# Altium PCB WX0.012.588PCB-4.2.PcbDoc
Units mil, origin at the board's own origin, x right, y up, seen from the top; angles counter-clockwise.
Board outline 5116.8 x 4810.03 mil, 2 copper layers (Top Layer, Bottom Layer); 13 components, 11 nets, 35 pads, 182 vias.
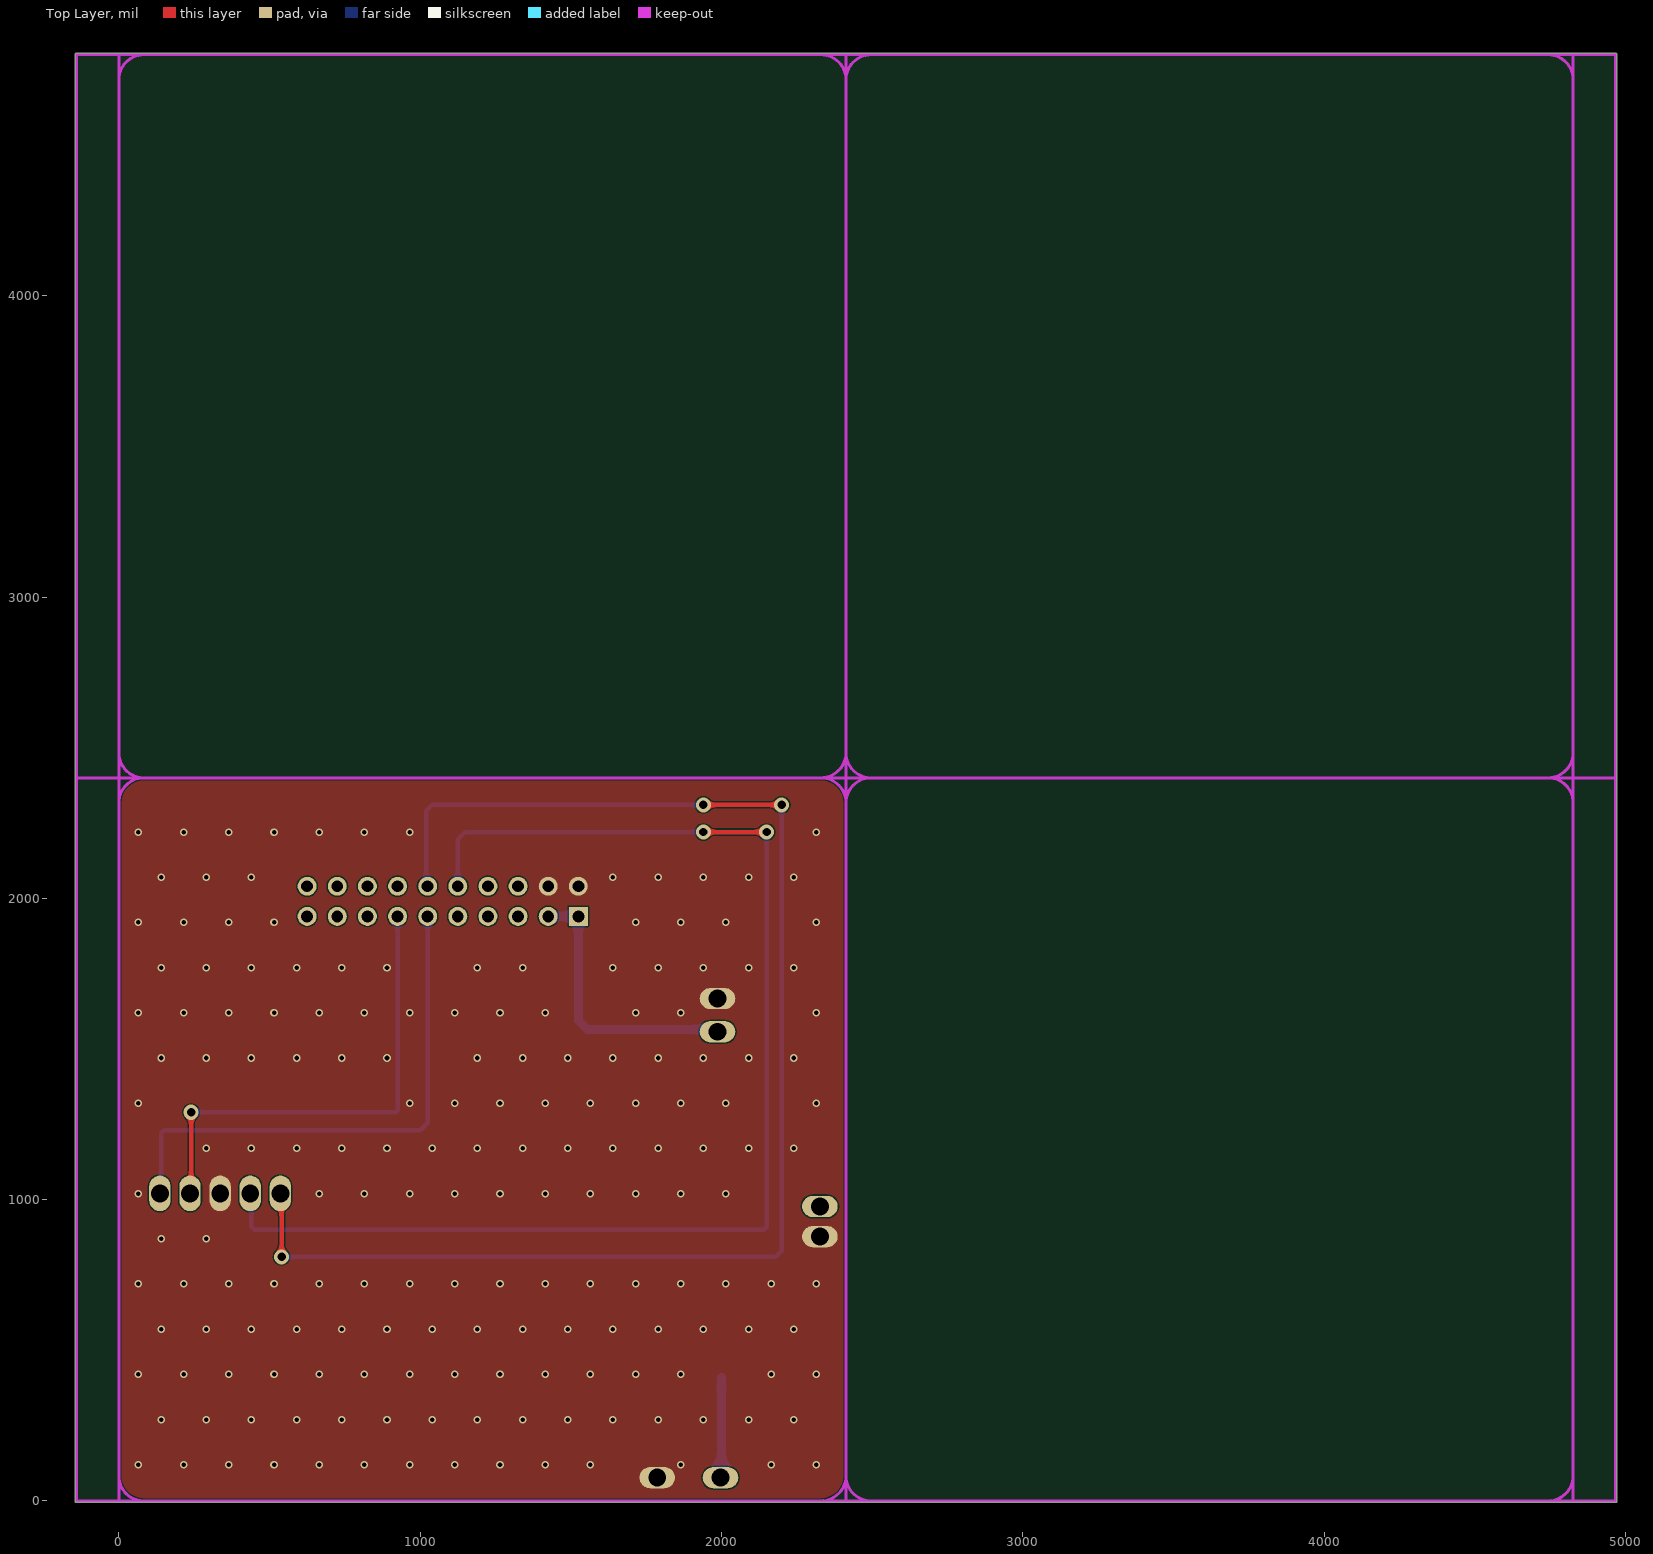
[diagram p0: Top Layer view]
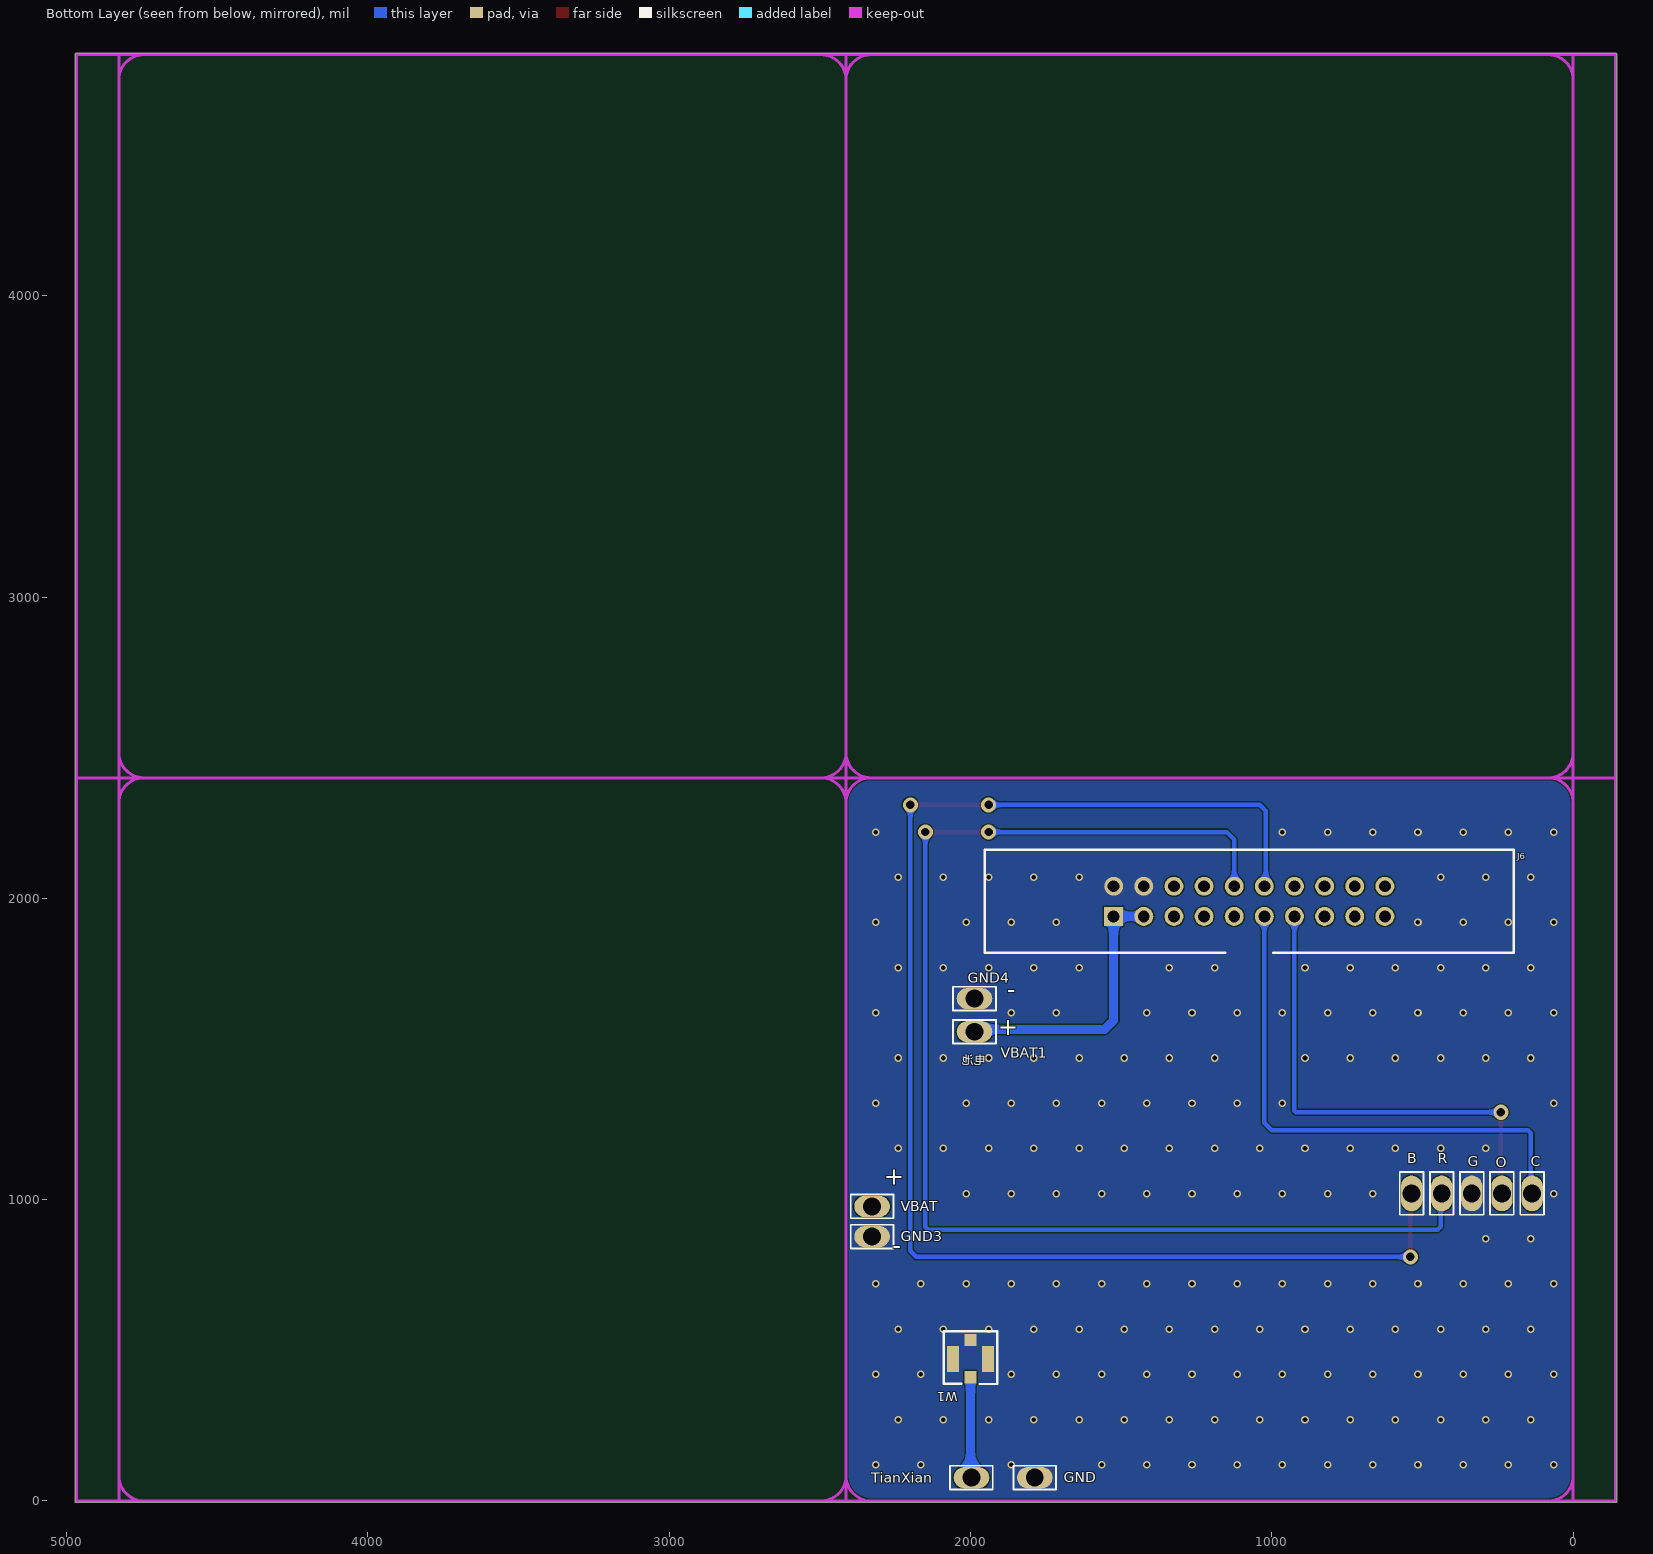
[diagram p1: Bottom Layer view, seen from below]

## Layer stack, top to bottom
Top Solder: solder mask 0.4, Solder Resist, Dk 3.5
Top Layer: signal copper 1.4
Dielectric 1: dielectric 12.6, FR-4, Dk 4.8
Bottom Layer: signal copper 1.4
Bottom Solder: solder mask 0.4, Solder Resist, Dk 3.5

## Board outline
-140,-5.02 70,-5.02 ccw(c70,0) 72.38,-4.42 ccw(c83.13,83.33) 79.81,-5.01 ccw(c80,0) 80,-5.02 2330,-5.02 ccw(c2330,0) 2330.03,-5.01 ccw(c2330,83.39) 2338.1,-4.64 ccw(c2340,0) 2340,-5.02 2483.39,-5.02 ccw(c2483.39,0) 2485.76,-4.42 ccw(c2496.52,83.33) 2493.2,-5.01 ccw(c2493.39,0) 2493.39,-5.02 4743.39,-5.02 ccw(c4743.39,0) 4743.42,-5.01 ccw(c4743.39,83.39) 4751.49,-4.64 ccw(c4753.39,0) 4753.39,-5.02 4966.77,-5.02 ccw(c4966.77,0) 4971.79,0 4971.79,4800 ccw(c4966.77,4800) 4966.77,4805.02 -140,4805.02 ccw(c-140,4800) -145.02,4800 -145.02,0 ccw(c-140,0)

## Design rules (kind name [scope] priority, off if disabled: settings)
Clearance [All] p1: gap=4 ignorepadtopadclearanceinfootprint=FALSE
MinimumSolderMaskSliver [All] p1: minsoldermaskwidth=0
PlaneConnect [All] p1: planeconnectstyle=Direct reliefexpansion=20 reliefentries=4 reliefconductorwidth=10 reliefairgap=10
PolygonConnect [All] p1: connectstyle=Direct reliefconductorwidth=10 reliefentries=4 polygonreliefangle="90 Angle" airgapwidth=10
RoutingVias [All] p1: holewidth=28 width=50 viastyle="Through Hole" minholewidth=28 minwidth=50 maxholewidth=28 maxwidth=50
SilkToSilkClearance [All] p1: silktosilkclearance=0
SilkToSolderMaskClearance [IsPad] p1: minsilkscreentomaskgap=0 clearancetoexposedcopper=TRUE
SolderMaskExpansion [All] p1: expansion=4
Width [All] p1: maxlimit=150 minlimit=15 preferedwidth=15
26 further rules are at their usual default settings.

## Components (designator, comment, footprint, x,y, rotation, side; value= is the part's Value field where it differs from the comment)
B "Test Point" TP5 136.26,1020.63 r0 bottom (schematic designator TP1)
C "Test Point" TP5 536.26,1020.63 r0 bottom (schematic designator TP1)
G "Test Point" TP5 336.26,1020.63 r0 bottom (schematic designator TP1)
GND "Test Point" TP5 1786.91,77.22 r270 bottom (schematic designator TP1)
GND3 "Test Point" TP5 2326.91,877.22 r270 bottom (schematic designator TP1)
GND4 "Test Point" TP5 1986.91,1667.22 r270 bottom (schematic designator TP1)
J6 "DC254_2*10" DC254_2*10 1075,1990 r90 bottom (schematic designator J1)
O "Test Point" TP5 436.26,1020.63 r0 bottom (schematic designator TP1)
R "Test Point" TP5 236.26,1020.63 r0 bottom (schematic designator TP1)
TianXian "Test Point" TP5 1996.91,77.22 r270 bottom (schematic designator TP1)
VBAT "Test Point" TP5 2326.91,977.22 r270 bottom (schematic designator TP1)
VBAT1 "Test Point" TP5 1986.91,1557.22 r270 bottom (schematic designator TP1)
W1 "天线" ANT-IPEX 2000,410 r180 bottom

## Footprints (in the part's own frame and the unit in brackets; to place one, negate y for a bottom-side part, rotate by r counter-clockwise, add the part's x,y. Pads: shape width x height; smd on the part's side, far side on the other; paste and mask are expansions set on the pad)
ANT-IPEX [mm] "IPX天线座"
  rect 1x1.05 smd: 1(0,0)
  rect 1x2.2 smd: 2(-1.475,1.55) 2(1.475,1.55)
  rect 1x1 smd: 2(0,3.151)
  silkscreen extent -2.26,-0.56 2.26,3.9
DC254_2*10 [mm]
  rect 1.6x1.6 hole 1: 1(-1.27,11.43)
  round 1.6 hole 1: 2(1.27,11.43) 3(-1.27,8.89) 4(1.27,8.89) 5(-1.27,6.35) 6(1.27,6.35) 7(-1.27,3.81) 8(1.27,3.81) 9(-1.27,1.27) 10(1.27,1.27) 11(-1.27,-1.27) 12(1.27,-1.27) 13(-1.27,-3.81) 14(1.27,-3.81) 15(-1.27,-6.35) 16(1.27,-6.35) 17(-1.27,-8.89) 18(1.27,-8.89) 19(-1.27,-11.43) 20(1.27,-11.43)
  silkscreen extent -4.35,-22.3 4.35,22.3
TP5 [mm]
  oval 1.8x3 hole 1.5: 1(0,0)
  silkscreen extent -1,-1.8 1,1.8

## Part data
B C G GND GND3 GND4 O R TianXian VBAT VBAT1: library part "Test Point  PASS", "测试点"
J6: library part 1010902-0139, "DC2 2.54mm 2x10pin,2.54mm间距，2x10pin，32×8.55×27.5mm,母头,双排,双排牛角座", Part Name=DC牛角座, ID=4, Part Number=1010902-0139, SMD/DIP=DIP
W1: library part 1010902-0145, "UB06000058A,3*3.1*1.25mm,公头,单排,IPEX一代板端"

## Via types
v1: diameter 25, hole 15, Top Layer to Bottom Layer, tented both sides, 176 vias
v2: diameter 50, hole 28, Top Layer to Bottom Layer, tented both sides, 6 vias

## Nets (pads, with @x,y where several pads share a name; then routed paths per layer and width w, separated by ;. In a path a pad name is that pad's centre, name@x,y a point inside that pad or via, vN(x,y) a via of type N, cw(c..) or ccw(c..) an arc to the next point about the centre after c; other vN are vias at no path point)
3.6V: J6.1 J6.3 VBAT1.1 | length 921.4
  Bottom Layer w30: J6.3 J6.1 1525,1595 1555,1565 VBAT1.1@1989,1565
CLOSE: B.1 J6.11 | length 1785.4
  Bottom Layer w15: B.1 140,1024.37 140,1220 150,1230 1000,1230 1025,1255 J6.11
DRV+: C.1 J6.12 | length 4797.9
  Top Layer w15: C.1 540,1016.89 v2(540,810) ; v2(1940,2310) v2(2200,2310)
  Bottom Layer w15: v2(540,810) 2180,810 2200,830 v2(2200,2310) ; J6.12@1030,2045 1020,2055 1020,2290 1040,2310 v2(1940,2310)
DRV-: J6.10 O.1 | length 4330.8
  Top Layer w15: v2(1940,2220) v2(2150,2220)
  Bottom Layer w15: O.1 440,1016.89 440,910 450,900 2140,900 2150,910 v2(2150,2220) ; J6.10 1125,2195 1150,2220 v2(1940,2220)
GND: G.1 GND3.1 GND4.1 GND.1 J6.2 J6.4 W1.2
  other v1: 65,120 215,120 365,120 515,120 665,120 815,120 965,120 1115,120 1265,120 1415,120 1565,120 1865,120 2165,120 2315,120 140,270 290,270 440,270 590,270 740,270 890,270 1040,270 1190,270 1340,270 1490,270 1640,270 1790,270 1940,270 2090,270 2240,270 65,420 215,420 365,420 515,420 665,420 815,420 965,420 1115,420 1265,420 1415,420 1565,420 1715,420 1865,420 2165,420 2315,420 140,570 290,570 440,570 590,570 740,570 890,570 1040,570 1190,570 1340,570 1490,570 1640,570 1790,570 1940,570 2090,570 2240,570 65,720 215,720 365,720 515,720 665,720 815,720 965,720 1115,720 1265,720 1415,720 1565,720 1715,720 1865,720 2015,720 2165,720 2315,720 140,870 290,870 65,1020 665,1020 815,1020 965,1020 1115,1020 1265,1020 1415,1020 1565,1020 1715,1020 1865,1020 2015,1020 290,1170 440,1170 590,1170 740,1170 890,1170 1040,1170 1190,1170 1340,1170 1490,1170 1640,1170 1790,1170 1940,1170 2090,1170 2240,1170 65,1320 965,1320 1115,1320 1265,1320 1415,1320 1565,1320 1715,1320 1865,1320 2015,1320 2315,1320 140,1470 290,1470 440,1470 590,1470 740,1470 890,1470 1190,1470 1340,1470 1490,1470 1640,1470 1790,1470 1940,1470 2090,1470 2240,1470 65,1620 215,1620 365,1620 515,1620 665,1620 815,1620 965,1620 1115,1620 1265,1620 1415,1620 1715,1620 1865,1620 2315,1620 140,1770 290,1770 440,1770 590,1770 740,1770 890,1770 1190,1770 1340,1770 1640,1770 1790,1770 1940,1770 2090,1770 2240,1770 65,1920 215,1920 365,1920 515,1920 1715,1920 1865,1920 2015,1920 2315,1920 140,2070 290,2070 440,2070 1640,2070 1790,2070 1940,2070 2090,2070 2240,2070 65,2220 215,2220 365,2220 515,2220 665,2220 815,2220 965,2220 2315,2220
OPEN: J6.13 R.1 | length 1603
  Top Layer w15: R.1 240,1024.37 v2(240,1290)
  Bottom Layer w15: v2(240,1290) 920,1290 925,1295 J6.13
tianxian: TianXian.1 W1.1 | length 330
  Bottom Layer w30: TianXian.1@2000,80 W1.1
VCC: J6.7
WF7502_D: J6.18
WF7502_P: J6.16
WF7502_T: J6.14 | length 7.1
  Top Layer w15: J6.14 J6.14@930,2045
pads on no net: J6.5 J6.6 J6.8 J6.9 J6.15 J6.17 J6.19 J6.20 VBAT.1

## Polygon pours and split planes (outlines as drawn)
GND on Top Layer "Top Layer-No Net" (solid, remove dead copper, pour order 32): -140,-5.02 70,-5.02 ccw(c70,0) 72.38,-4.42 ccw(c83.13,83.33) 79.81,-5.01 ccw(c80,0) 80,-5.02 2330,-5.02 ccw(c2330,0) 2330.03,-5.01 cw(c2330.02,83.36) 2330,-5.01 2330.03,-5.01 ccw(c2330,83.39) 2338.1,-4.64 ccw(c2340,0) 2340,-5.02 2413.39,-5.02 ccw(c2413.39,0) 2418.4,0 2418.4,2400 ccw(c2413.39,2400) 2413.39,2405.01 -140,2405.01 ccw(c-140,2400) -145.02,2400 -145.02,0 ccw(c-140,0)
GND on Bottom Layer "Top Layer-No Net1" (solid, remove dead copper, pour order 33): -140,-5.02 70,-5.02 ccw(c70,0) 72.38,-4.42 ccw(c83.13,83.33) 79.81,-5.01 ccw(c80,0) 80,-5.02 2330,-5.02 ccw(c2330,0) 2330.03,-5.01 cw(c2330.02,83.36) 2330,-5.01 2330.03,-5.01 ccw(c2330,83.39) 2338.1,-4.64 ccw(c2340,0) 2340,-5.02 2413.39,-5.02 ccw(c2413.39,0) 2418.4,0 2418.4,2400 ccw(c2413.39,2400) 2413.39,2405.01 -140,2405.01 ccw(c-140,2400) -145.02,2400 -145.02,0 ccw(c-140,0)

## Keep-outs
Keep-Out Layer:
  lines w10: -0.25,83.33 ccw(c83.13,83.33) 80,0 2330,0 ccw(c2330,83.39) 2413.39,83.39 ; -0.25,2483.33 ccw(c83.13,2483.33) 80,2400 ; 0,2320 0,80 0,0 ; 0,4720 0,2480 0,2400 ; 70,0 0,0 ; 70,2400 0,2400 ; 83.39,2400 ccw(c83.39,2316.61) 0,2316.61 0,2400 ; 83.39,4800 ccw(c83.39,4716.61) 0,4716.61 0,4800 ; 2340,0 2413.39,0 ; 2340,2400 2413.39,2400 ; 2413.13,83.33 ccw(c2496.52,83.33) 2493.39,0 4743.39,0 ccw(c4743.39,83.39) 4826.77,83.39 ; 2413.13,2483.33 ccw(c2496.52,2483.33) 2493.39,2400 ; 2413.39,2193.46 2413.39,2400 ; 2413.39,2320 2413.39,80 2413.39,0 ; 2413.39,2330 2413.39,83.39 ; 2413.39,4593.46 2413.39,4800 ; 2413.39,4720 2413.39,2480 2413.39,2400 ; 2413.39,4730 2413.39,2483.39 ; 2483.39,0 2413.39,0 ; 2483.39,2400 2413.39,2400 ; 2496.77,2400 ccw(c2496.77,2316.61) 2413.39,2316.61 ; 2496.77,4800 ccw(c2496.77,4716.61) 2413.39,4716.61 ; 4753.39,0 4826.77,0 ; 4753.39,2400 4826.77,2400 ; 4826.77,2193.46 4826.77,2400 ; 4826.77,2316.61 ccw(c4743.39,2316.61) 4743.39,2400 ; 4826.77,2330 4826.77,83.39 ; 4826.77,4593.46 4826.77,4800 ; 4826.77,4716.61 ccw(c4743.39,4716.61) 4743.39,4800 ; 4826.77,4730 4826.77,2483.39 ; -140,2400 -140,0 0,0 ; -140,2400 0,2400 ; -140,2400 0,2400 ; -140,2400 -140,4800 0,4800 ; 0,2400 80,2400 ; 0,4800 80,4800 2330,4800 ; 80,2400 2330,2400 ; 80,2400 2330,2400 ; 2330,2400 cw(c2330,2316.61) 2413.39,2316.61 ; 2330,2400 ccw(c2330,2483.39) 2413.39,2483.39 ; 2330,2400 2413.39,2400 ; 2330,4800 cw(c2330,4716.61) 2413.39,4716.61 ; 2330,4800 2413.39,4800 ; 2413.39,0 2413.39,83.39 ; 2413.39,2316.61 2413.39,2400 ; 2413.39,2400 2493.39,2400 ; 2413.39,2400 2413.39,2483.39 ; 2413.39,4716.61 2413.39,4800 ; 2413.39,4800 2493.39,4800 4743.39,4800 ; 2493.39,2400 4743.39,2400 ; 2493.39,2400 4743.39,2400 ; 4743.39,2400 ccw(c4743.39,2483.39) 4826.77,2483.39 ; 4743.39,2400 4826.77,2400 ; 4743.39,4800 4826.77,4800 ; 4826.77,0 4826.77,83.39 ; 4826.77,0 4966.77,0 4966.77,2400 ; 4826.77,2400 4826.77,2483.39 ; 4826.77,2400 4966.77,2400 ; 4826.77,2400 4966.77,2400 ; 4826.77,4800 4966.77,4800 4966.77,2400

## Silkscreen, mask and mechanical layers (free items; w line width, h text height)
Bottom Overlay:
  text "-" at 1850,1650 h100
  text "+" at 1841,1526 h100
  text "电池" at 1950,1440 h50
  text "+" at 2220,1030 h100
  text "-" at 2230,800 h100